# Altium PCB JeffEncoder.PcbDoc
Units mm, origin at the board's own origin, x right, y up, seen from the top; angles counter-clockwise.
Board outline 20 x 20.38 mm, 2 copper layers (Top Layer, Bottom Layer); 7 components, 0 nets, 52 pads, 0 vias.
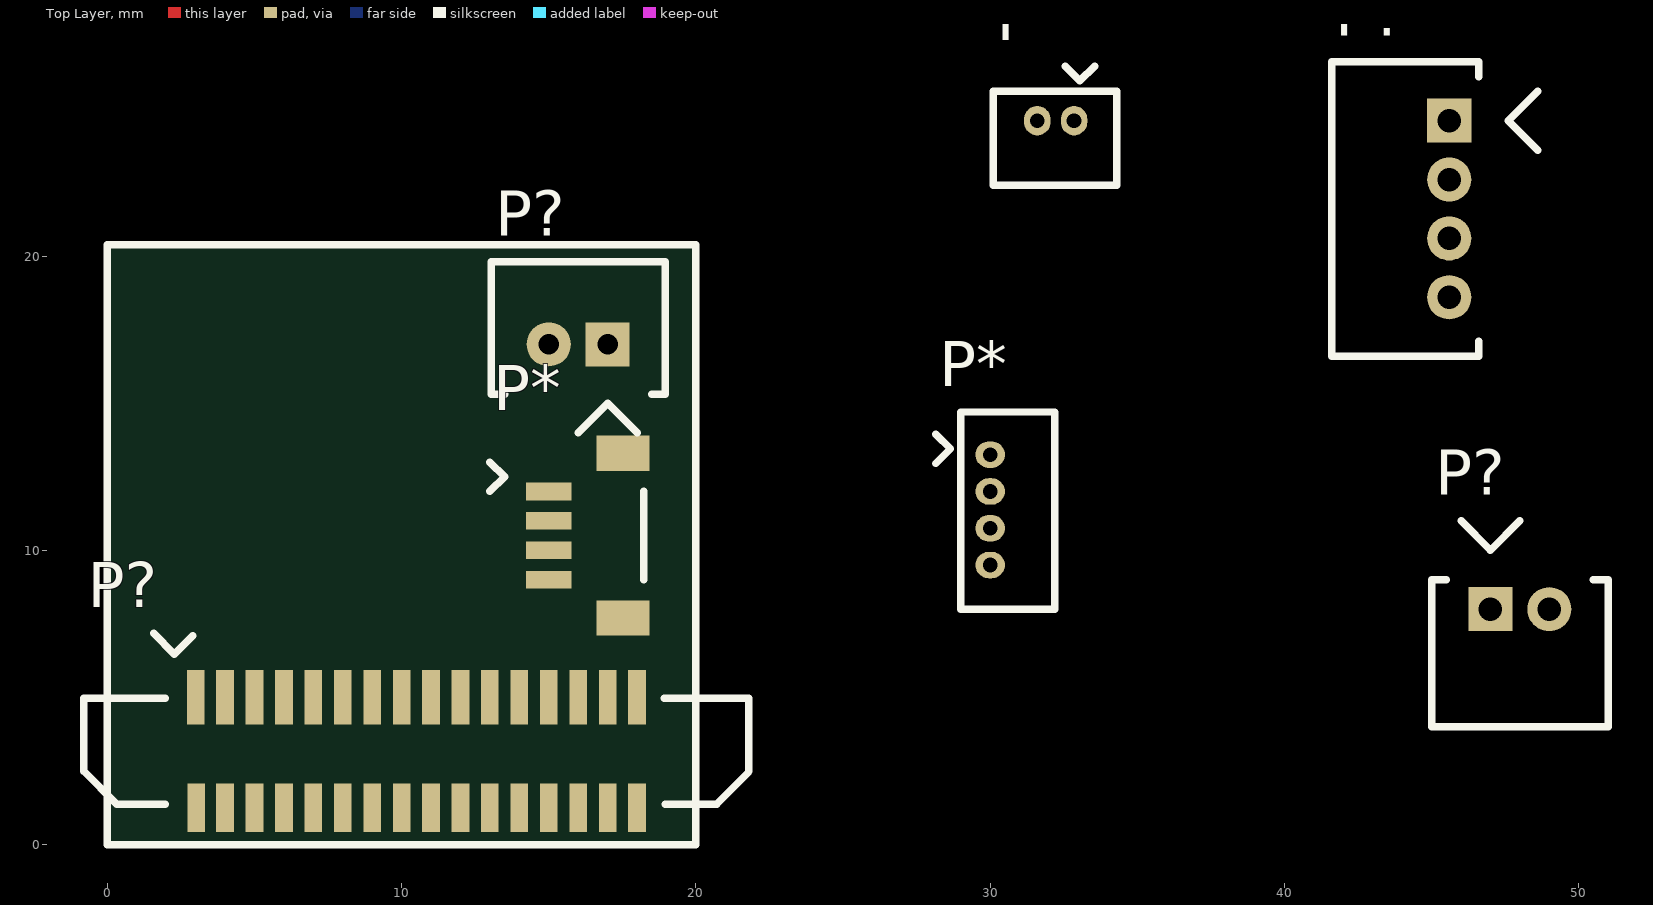
[diagram p0: Top Layer view]
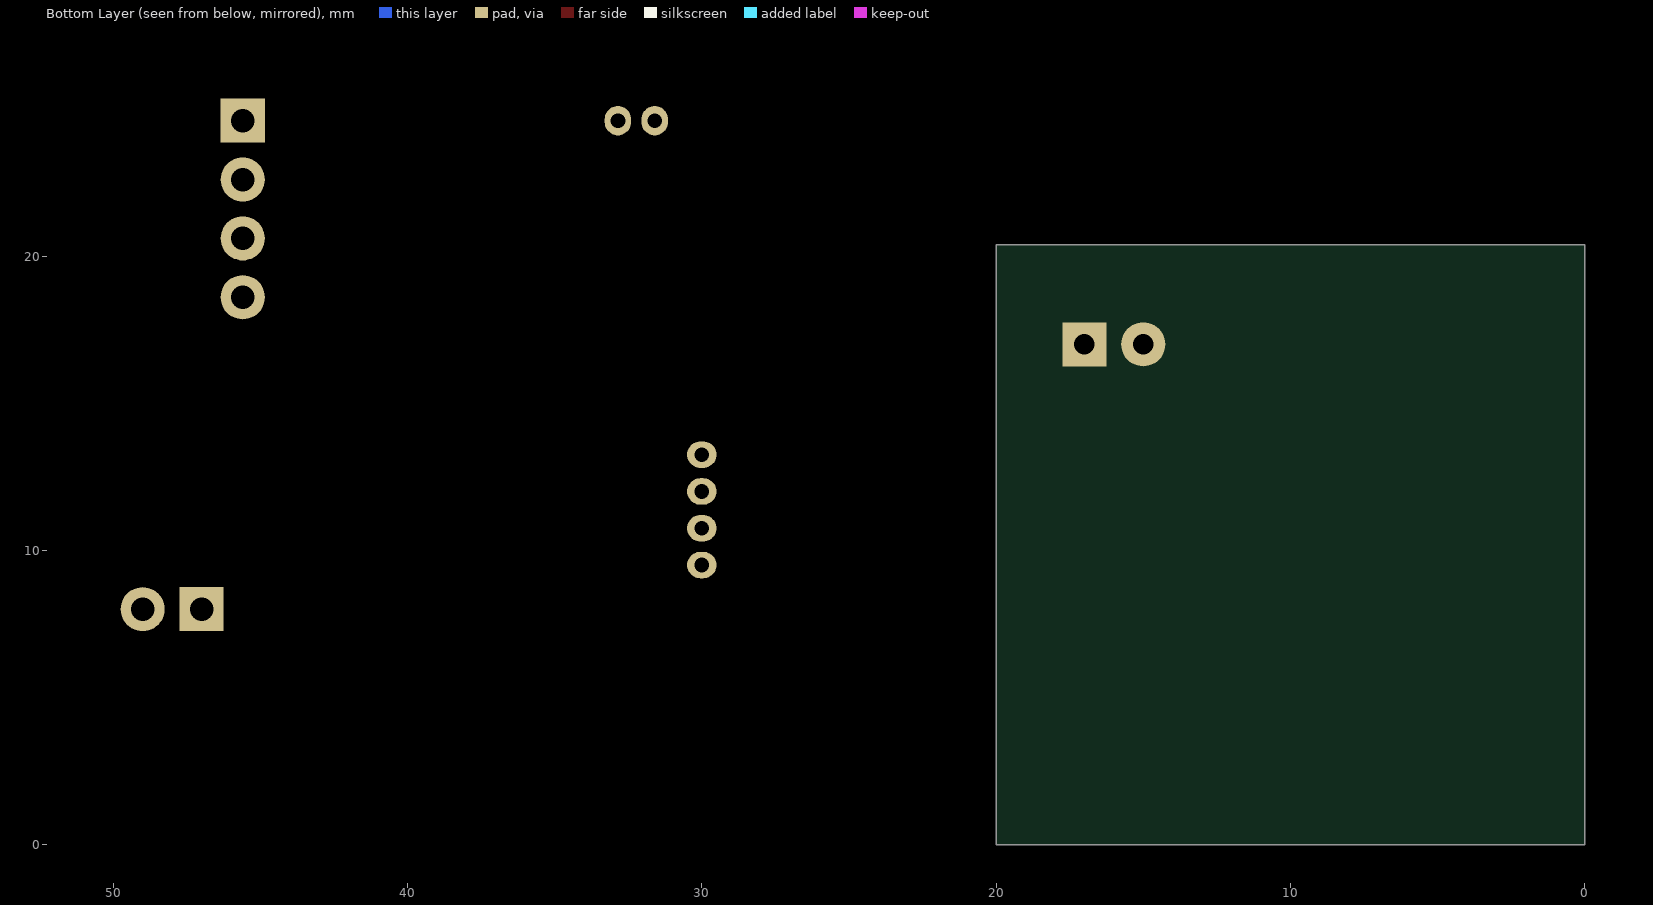
[diagram p1: Bottom Layer view, seen from below]

## Layer stack, top to bottom
Top Solder: solder mask 0.0102, Solder Resist, Dk 3.5
Top Layer: signal copper 0.0356
Dielectric 1: dielectric 0.32, FR-4, Dk 4.8
Bottom Layer: signal copper 0.0356
Bottom Solder: solder mask 0.0102, Solder Resist, Dk 3.5

## Board outline
0,0 20,0 20,20.38 0,20.38

## Design rules (kind name [scope] priority, off if disabled: settings)
Clearance [All] p1: gap=0.254
PolygonConnect [All] p1: connectstyle=Relief reliefconductorwidth=0.254 reliefentries=4 polygonreliefangle="90 Angle" airgapwidth=0.254
RoomDefinition JeffEncoder [InComponentClass('JeffEncoder')] p1: confinementstyle=ConfineIn formatcopy=TRUE lockcomponents=FALSE outline 20.6,2.6 56.6,2.6 56.6,29.6 20.6,29.6
RoutingVias [All] p1: holewidth=0.711 width=1.27 viastyle="Through Hole" minholewidth=0.711 minwidth=1.27 maxholewidth=0.711 maxwidth=1.27
SolderMaskExpansion [All] p1: expansion=0.102
Width [All] p1: maxlimit=0.254 minlimit=0.254 preferedwidth=0.254
30 further rules are at their usual default settings.

## Classes and differential pairs
component class JeffEncoder: P* P?

## Components (designator, comment, footprint, x,y, rotation, side; value= is the part's Value field where it differs from the comment)
P* "Molex 53047-0410" "MOLEX 53047-0410" 30,12 r90 top
P* "Molex 53047-0210" "MOLEX 53047-0210" 31.6,24.6 r0 top
P* "JST BM04B-SRSS-TB(LF)(SN)" "JST BM04B-SRSS-TB(LF)(SN)" 15,12 r270 top
P? "Hirose DF3A-4P-2DSA" "HIROSE DF3A-4P-2DSA" 45.6,24.6 r90 top
P? "Hirose DF3A-2P-2DSA" "HIROSE DF3A-2P-2DSA" 47,8 r180 top
P? "Molex 052610-1671" "Molex 052610-1671" 3,5 r0 top
P? "JST B2B-PH-K-S(LF)(SN)" "JST B2B-PH-K-S(LF)(SN)" 17,17 r0 top

## Footprints (in the part's own frame and the unit in brackets; to place one, negate y for a bottom-side part, rotate by r counter-clockwise, add the part's x,y. Pads: shape width x height; smd on the part's side, far side on the other; paste and mask are expansions set on the pad)
"HIROSE DF3A-2P-2DSA" [mm] "7 pin connector, 2mm pitch straight through hole"
  rect 1.5x1.5 hole 0.8: 1(0,0)
  round 1.5 hole 0.8: 2(-2,0)
  silkscreen extent -4,-3 2,4, body extent -3.99,-1.36 2.01,3.64, height 5.05
"HIROSE DF3A-4P-2DSA" [mm] "7 pin connector, 2mm pitch straight through hole"
  rect 1.5x1.5 hole 0.8: 1(0,0)
  round 1.5 hole 0.8: 2(-2,0) 3(-4,0) 4(-6,0)
  silkscreen extent -8,-3 2,4, body extent -8.02,-1.34 1.98,3.66, height 5.05
"JST B2B-PH-K-S(LF)(SN)" [mm] "2 pin connector, 2mm pitch straight through hole"
  rect 1.5x1.5 hole 0.7: 1(0,0)
  round 1.5 hole 0.7: 2(-2,0)
  silkscreen extent -3.95,-3 1.95,2.8
"JST BM04B-SRSS-TB(LF)(SN)" [mm]
  rect 0.6x1.55 smd: 1(0,0) 2(1,0) 3(2,0) 4(3,0)
  rect 1.2x1.8 smd: 5(4.3,2.525) 6(-1.3,2.525)
  silkscreen extent -1,-2 3,3.22
"Molex 052610-1671" [mm] "16 pin FFC straight SMT"
  rect 0.6x1.85 smd: 1(0,0) 2(1,0) 3(2,0) 4(3,0) 5(4,0) 6(5,0) 7(6,0) 8(7,0) 9(8,0) 10(9,0) 11(10,0) 12(11,0) 13(12,0) 14(13,0) 15(14,0) 16(15,0)
  rect 0.6x1.65 smd: 1(0.025,-3.75) 2(1,-3.75) 3(2,-3.75) 4(3,-3.75) 5(4,-3.75) 6(5,-3.75) 7(6,-3.75) 8(7,-3.75) 9(8,-3.75) 10(9,-3.75) 11(10,-3.75) 12(11,-3.75) 13(12,-3.75) 14(13,-3.75) 15(14,-3.75) 16(15,-3.75)
  silkscreen extent -3.8,-3.62 18.8,2.17
"MOLEX 53047-0210" [mm]
  oval 0.9x1 hole 0.5: 1(1.25,0) 2(0,0)
  silkscreen extent -1.5,-2.2 2.7,1.85
"MOLEX 53047-0410" [mm]
  oval 0.9x1 hole 0.5: 1(1.25,0) 2(0,0) 3(-1.25,0) 4(-2.5,0)
  silkscreen extent -4,-2.2 2.7,1.85

## Part data
P*: "Molex PicoBlade, 4 pin"
P*: "Molex PicoBlade, 2 pin"
P*: "JST 1mm, 4 pin"
P?: "4 pin 2mm straight through hole"
P? P?: "2 pin 2mm straight through hole"
P?: "16 pin FFC straight SMT"

## Nets (pads, with @x,y where several pads share a name; then routed paths per layer and width w, separated by ;. In a path a pad name is that pad's centre, name@x,y a point inside that pad or via, vN(x,y) a via of type N, cw(c..) or ccw(c..) an arc to the next point about the centre after c; other vN are vias at no path point)
pads on no net: P*.1 P*.2 P*.3 P*.4 P*.5 P*.6 P?.1 P?.2 P?.3 P?.4 P?.5 P?.6 P?.7 P?.8 P?.9 P?.10 P?.11 P?.12 P?.13 P?.14 P?.15 P?.16

## Silkscreen, mask and mechanical layers (free items; w line width, h text height)
Top Overlay:
  the board outline again, w0.254